# EAGLE board Frequency (EAGLE 9.6.2)

Size 200.66 x 49.53 mm. Coordinates in mm from the lower left corner, seen from the top.
Outline: 0,0 200.66,0 200.66,49.53 0,49.53 0,0
Copper layers (1*16): Top 0.035mm / dielectric 1.5mm / Bottom 0.035mm
Design rules "default": minimum track width 6mil, minimum drill 0.35mm, track to track 6mil, track to pad 6mil, pad to pad 6mil, via to via 6mil, smd to smd 6mil, copper to edge 40mil, drill to drill 6mil, minimum pad ring 10mil, minimum via ring 8mil, stop-mask expansion 4mil, vias tented up to drill 0mil, thermal gap 10mil

## Footprints (pad centres in the part's own frame; a part is rotated, then mirrored left to right if it is on the bottom)
C050-025X075 = drill 0.813 octagon: 1 -2.54,0; 2 2.54,0
AK500/5-H = drill 1.321 long: 1 -10.033,0; 2 -5.004,0; 3 0,0; 4 5.004,0; 5 10.008,0
WS2812B-PTH-KIT = drill 0.762 pad 1.27 offset: DI 2.413,0.079; DO -2.159,0.651; GND 0.889,0.651; VCC -0.635,0.079
3,3 = hole 3.3: 0,0
0207/7 = drill 0.8 pad 1.524 octagon: 1 -3.81,0; 2 3.81,0
TL1105 = drill 1 pad 1.676: 1 -2.25,3.25; 2 2.25,3.25; 3 -2.25,-3.25; 4 2.25,-3.25

## Placement (x,y rotation side)
C1  100nf  [C050-025X075]  26.67,26.67 0 top
C2  100nf  [C050-025X075]  57.15,26.67 0 top
C3  100nf  [C050-025X075]  87.63,26.67 0 top
C4  100nf  [C050-025X075]  118.11,26.67 0 top
C5  100nf  [C050-025X075]  148.59,26.67 0 top
C6  100nf  [C050-025X075]  179.07,26.67 0 top
CON1  [AK500/5-H]  170.18,7.62 180 top
D1  WS2812D  [WS2812B-PTH-KIT]  26.67,35.81 180 top
D2  WS2812D  [WS2812B-PTH-KIT]  57.15,35.81 180 top
D3  WS2812D  [WS2812B-PTH-KIT]  87.63,35.81 180 top
D4  WS2812D  [WS2812B-PTH-KIT]  118.11,35.81 180 top
D5  WS2812D  [WS2812B-PTH-KIT]  148.59,35.81 180 top
D6  WS2812D  [WS2812B-PTH-KIT]  179.07,35.81 180 top
E$20  [3,3]  7.62,41.91 0 top
E$21  [3,3]  7.62,7.62 0 top
E$22  [3,3]  193.04,41.91 0 top
E$23  [3,3]  193.04,7.62 0 top
R1  75  [0207/7]  19.05,30.48 90 top
R2  75  [0207/7]  49.53,30.48 90 top
R3  75  [0207/7]  80.01,30.48 90 top
R4  75  [0207/7]  110.49,30.48 90 top
R5  75  [0207/7]  140.97,30.48 90 top
R6  75  [0207/7]  171.45,30.48 90 top
SW1  [TL1105]  104.14,8.89 0 top

## Library data of the parts
C1-C6 R1-R6 = Clean-Kong
CON1 = con-ptr500
D1-D6 = G0PJO - LED
E$20-E$23 = holes
SW1 = switch

## Nets
S$1: C1.1 C2.1 C3.1 C4.1 C5.1 C6.1 CON1.5 D1.GND D2.GND D3.GND D4.GND D5.GND D6.GND SW1.2
S$2: C1.2 C2.2 C3.2 C4.2 C5.2 C6.2 CON1.4 D1.VCC D2.VCC D3.VCC D4.VCC D5.VCC D6.VCC
S$3: CON1.1 SW1.1
S$4: CON1.3 R1.1
S$5: D1.DI R1.2
S$6: D2.DI R2.2
S$7: D3.DI R3.2
S$8: D4.DI R4.2
S$9: D5.DI R5.2
S$10: D6.DI R6.2
S$11: D5.DO R6.1
S$12: D4.DO R5.1
S$13: D3.DO R4.1
S$14: D2.DO R3.1
S$15: D1.DO R2.1
S$16: CON1.2 D6.DO

## Tracks (layer width: path | path; a pad name or v marks a point on that pad's centre or on a via)
S$1  (13 unrouted)
S$2  (12 unrouted)
S$3  (1 unrouted)
S$4  (1 unrouted)
S$5  (1 unrouted)
S$6  (1 unrouted)
S$7  (1 unrouted)
S$8  (1 unrouted)
S$9  (1 unrouted)
S$10  (1 unrouted)
S$11  (1 unrouted)
S$12  (1 unrouted)
S$13  (1 unrouted)
S$14  (1 unrouted)
S$15  (1 unrouted)
S$16  (1 unrouted)

## Text on the board
tNames: BeaconBox Frequency Plus Data V1.0 | 14.100 MHz | 18.110 MHz | 21.150 MHz | 24.930 MHz | 28.200 MHz | Data | Mode | M.D.Waller G0PJO (c) Copyright 2024. All rights reserved. | 5 - GND 2 - DOUT / 4 - 5V 1 - MODE / 3 - DIN